# Altium PCB 电机驱动2.PcbDoc
Units mil, origin at the board's own origin, x right, y up, seen from the top; angles counter-clockwise.
Board outline 2768.94 x 1300.39 mil, 2 copper layers (Top Layer, Bottom Layer); 44 components, 28 nets, 129 pads, 42 vias.
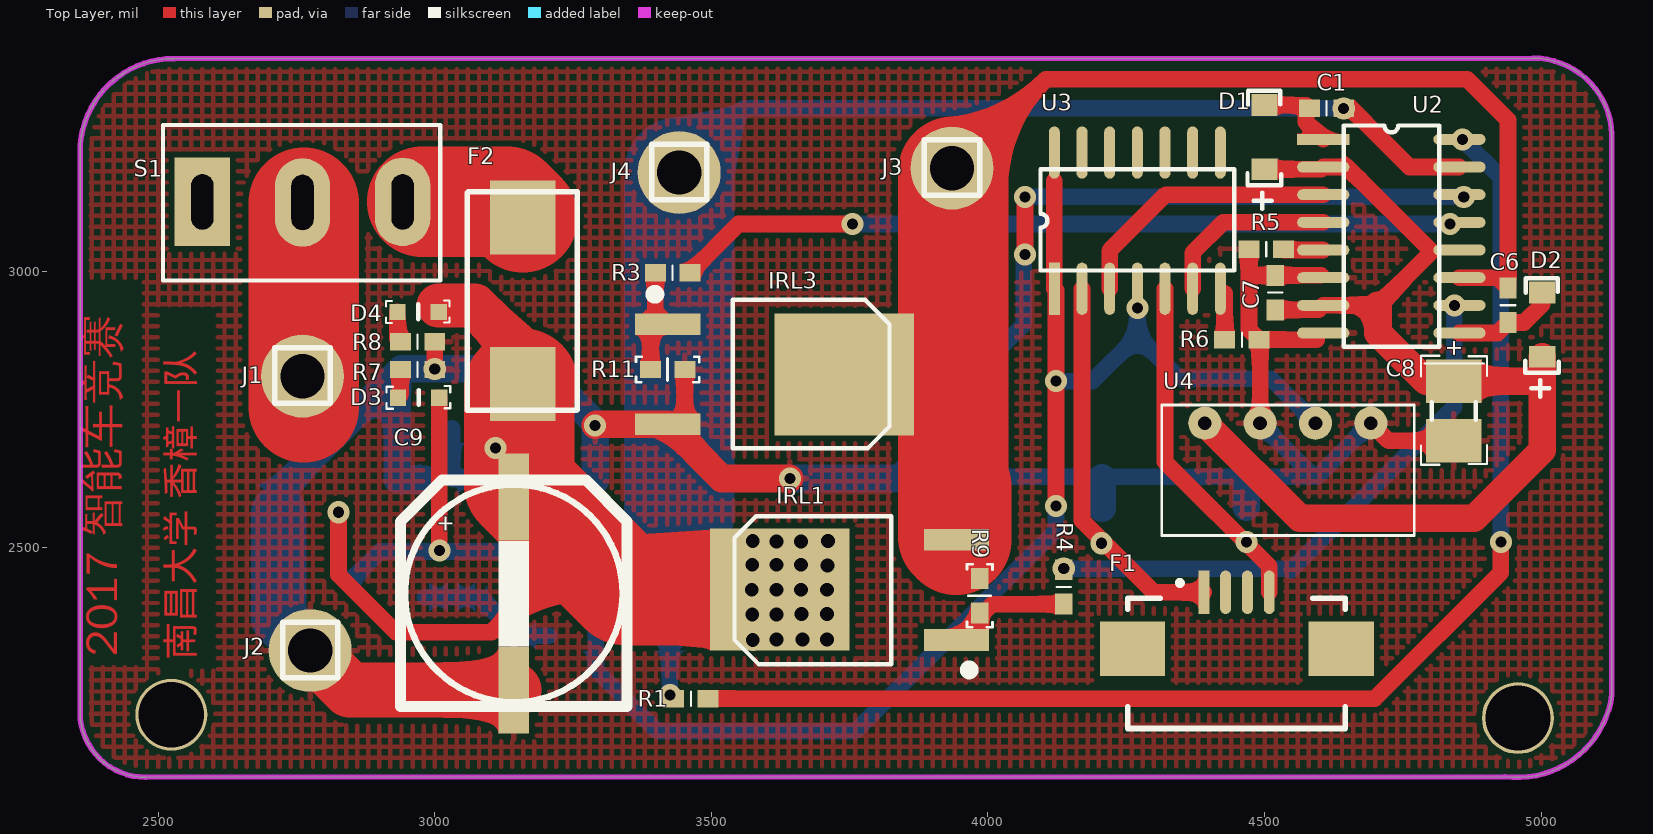
[diagram p0: Top Layer view]
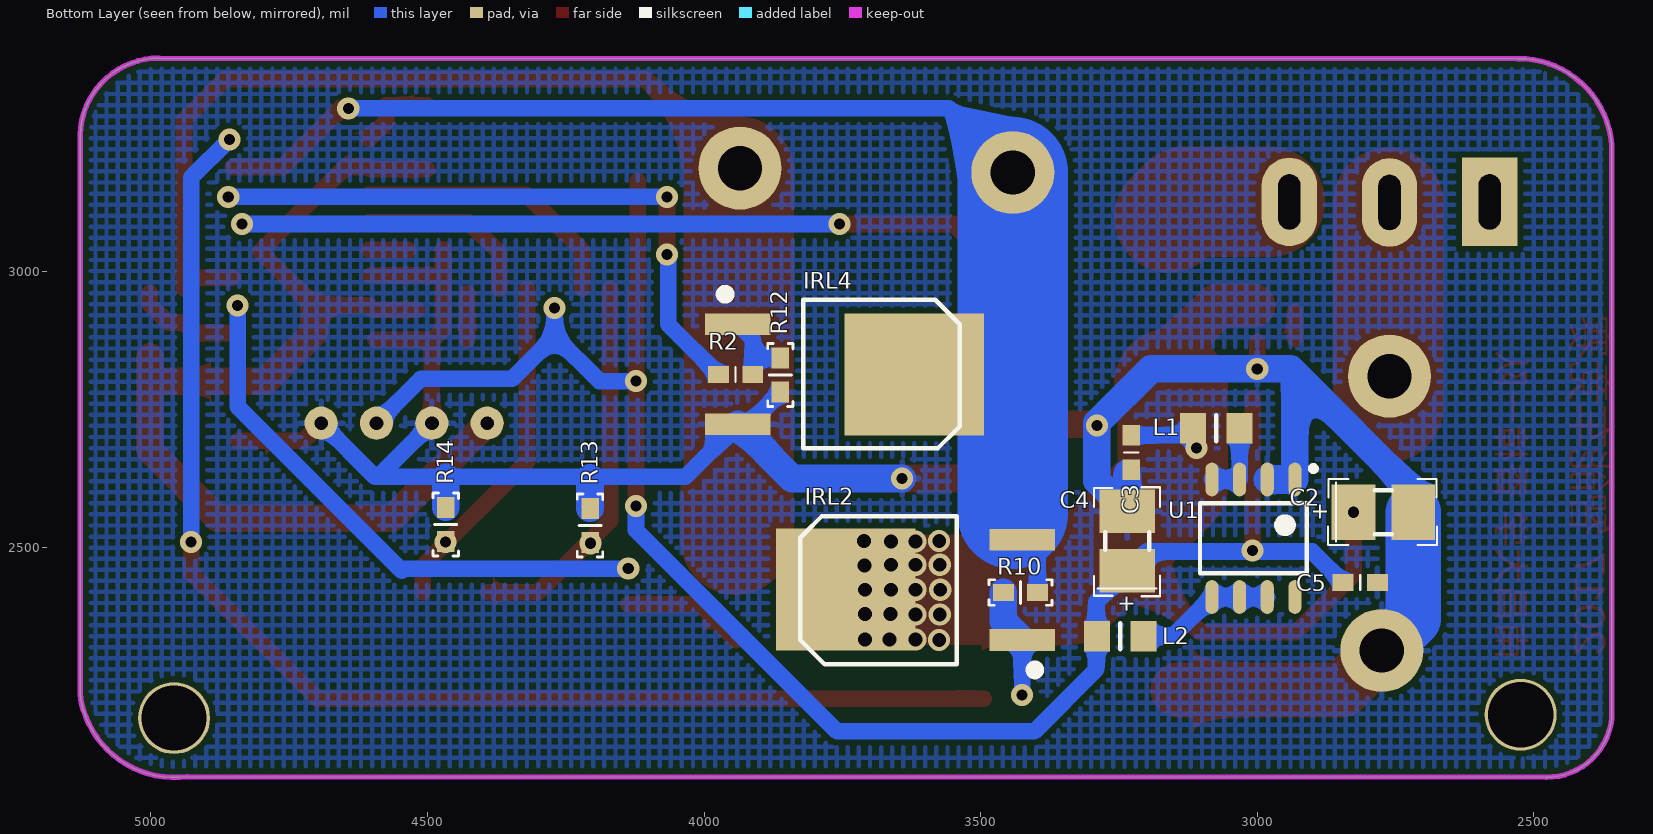
[diagram p1: Bottom Layer view, seen from below]
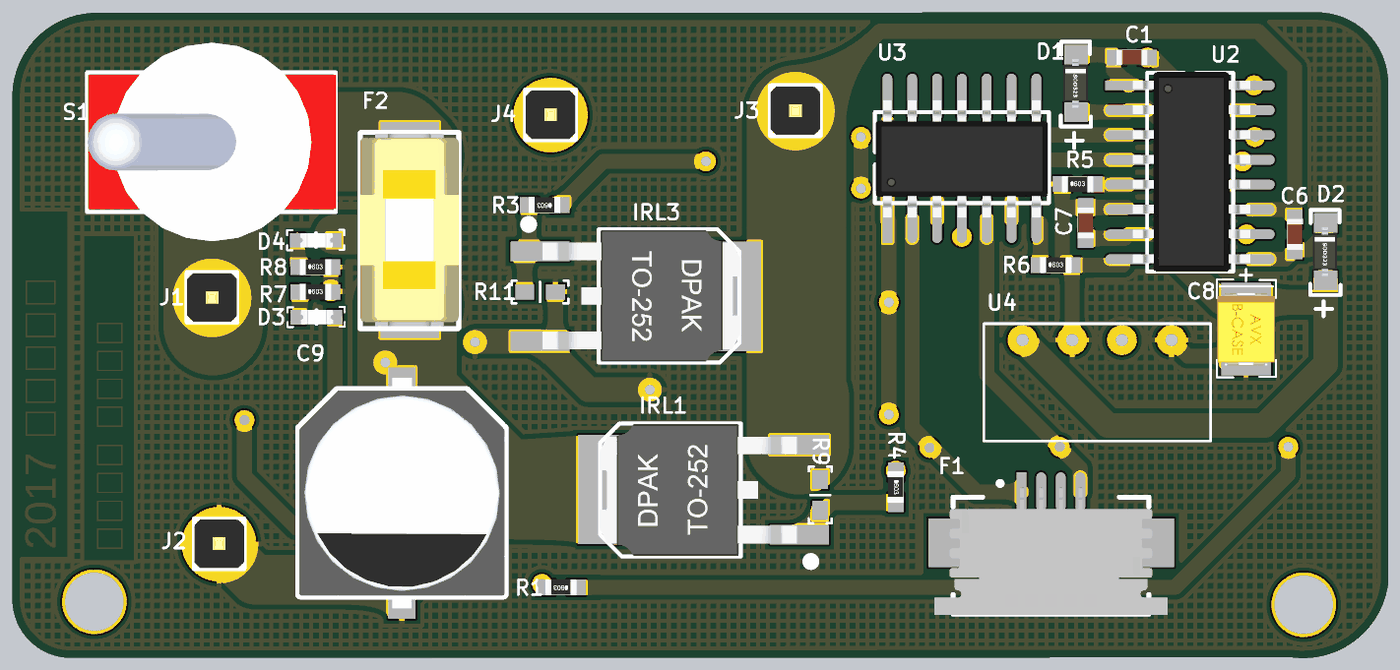
[diagram p2: 3D render of the assembled board from above, using the file's embedded part models]
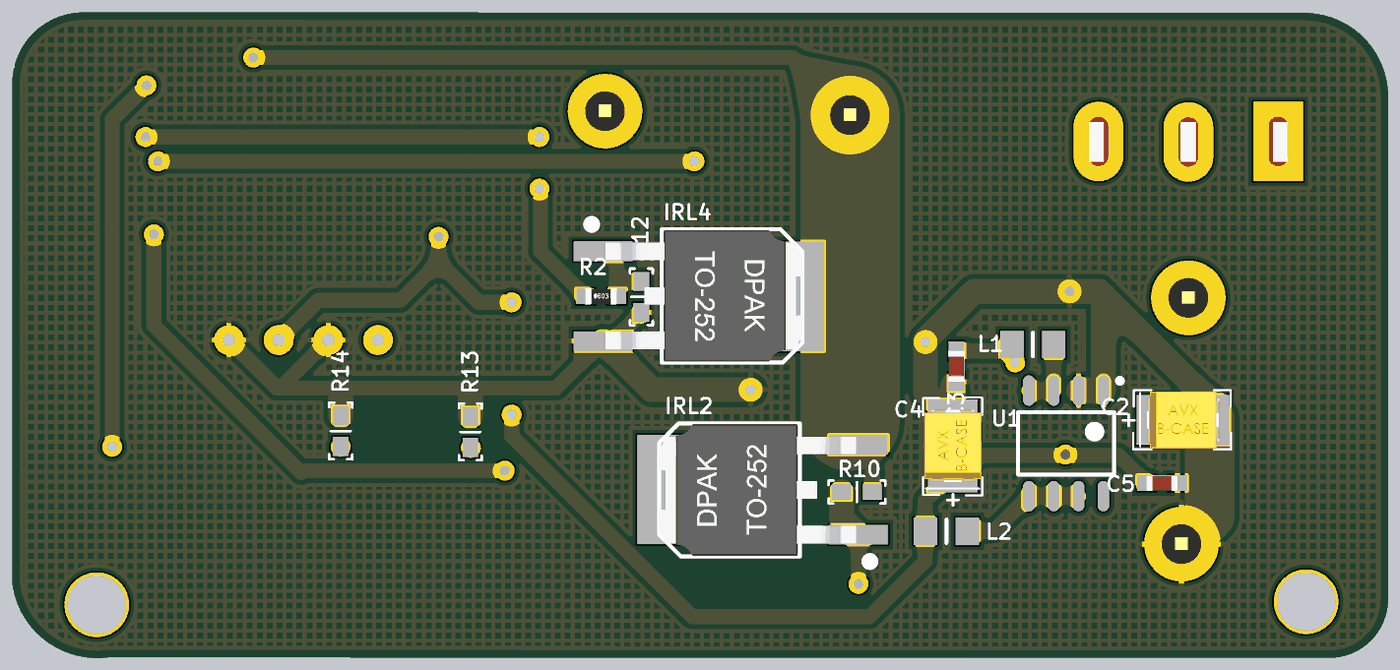
[diagram p3: 3D render of the assembled board from below, using the file's embedded part models]

## Layer stack, top to bottom
Top Solder: solder mask 0.4, Solder Resist, Dk 3.5
Top Layer: signal copper 1.4
Dielectric 1: dielectric 12.6, FR-4, Dk 4.8
Bottom Layer: signal copper 1.4
Bottom Solder: solder mask 0.4, Solder Resist, Dk 3.5

## Board outline
2359.01,2201.99 ccw(c2476.9,2202.91) 2477.82,2085.02 4934,2086 ccw(c4956.76,2257.12) 5127.88,2234.36 5127.88,3246.36 ccw(c4984.84,3241.83) 4985.03,3384.94 4984.79,3384.98 2529,3384 ccw(c2528,3214.94) 2358.94,3214.94 2359,3214

## Design rules (kind name [scope] priority, off if disabled: settings)
Clearance [All] p1: gap=10
PolygonConnect [All] p1: connectstyle=Relief reliefconductorwidth=10 reliefentries=4 polygonreliefangle="90 Angle" airgapwidth=10
RoutingVias [All] p1: holewidth=20 width=40 viastyle="Through Hole" minholewidth=20 minwidth=40 maxholewidth=20 maxwidth=40
SolderMaskExpansion [All] p1: expansion=4
UnpouredPolygon [All] p1: allowunpoured=FALSE
Width [All] p1: maxlimit=300 minlimit=3 preferedwidth=30
29 further rules are at their usual default settings.

## Components (designator, comment, footprint, x,y, rotation, side; value= is the part's Value field where it differs from the comment)
C1 "CAP-0603(1608)" CAP-0603 4612,3294 r0 top
C2 "CAP-TAN-3528(B)" CAP-3528 2772,2564 r180 bottom
C3 "CAP-0603(1608)" CAP-0603 3228,2672 r90 bottom
C4 "CAP-TAN-3528(B)" CAP-3528 3235,2512 r90 bottom
C5 "CAP-0603(1608)" CAP-0603 2814,2437 r0 bottom
C6 "CAP-0603(1608)" CAP-0603 4940,2938 r90 top
C7 "CAP-0603(1608)" CAP-0603 4519,2961 r270 top
C8 "CAP-TAN-3528(B)" CAP-3528 4842,2747 r270 top
C9 "CAP-SMD-1000UF" CAP-SMD-1000UF 3119,2416 r270 top
D1 "1N5819-S4" SOD-323 4505,3246 r90 top
D2 "1N5819-S4" SOD-323 5007,2907 r90 top
D3 "LED-0603" LED-0603 2971,2771 r180 top
D4 "LED-0603" LED-0603 2970,2926 r180 top
F1 "FPC-1.0-4" FPC-1.0-4 4444,2308 r0 top
F2 "FUSE-1808-Base" Fuse1808_Base 3159,3097 r270 top
IRL1 "IRLR7843" TO-252 3941,2427 r90 top
IRL2 "IRLR7843" TO-252 3427,2427 r90 bottom
IRL3 "IRLR7843" TO-252 3423,2810 r270 top
IRL4 "IRLR7843" TO-252 3937,2810 r270 bottom
J1 "IN+" HEADER1X1 2761,2811 r0 top
J2 "IN-" HEADER1X1 2775,2315 r0 top
J3 "OUT-" HEADER1X1 3935,3187 r0 top
J4 "OUT+" HEADER1X1 3442,3179 r0 top
L1 "INTUCTOR" "L0805 - duplicate" 3074,2716 r0 bottom
L2 "INTUCTOR" "L0805 - duplicate" 3248,2340 r0 bottom
R1 "RES-0603" RES-0603 3463,2227 r180 top
R2 "RES-0603" RES-0603 3943,2813 r180 bottom
R3 "RES-0603" RES-0603 3430,2997 r180 top
R4 "RES-0603" RES-0603 4137,2429 r270 top
R5 "RES-0603" RES-0603 4503,3039 r0 top
R6 "RES-0603" RES-0603 4459,2876 r0 top
R7 "RES-0603" RES-0603 2969,2822 r0 top
R8 "RES-0603" RES-0603 2969,2872 r0 top
R9 "RES" 0603RC 3985,2444 r270 top
R10 "RES" 0603RC 3397,2419 r0 bottom
R11 "RES" 0603RC 3452,2822 r180 top
R12 "RES" 0603RC 3862,2781 r90 bottom
R13 "1K" 0603RC 4206,2571 r270 bottom
R14 "1K" 0603RC 4467,2573 r270 bottom
S1 "SW-B" SW-B 2761,3124 r0 top
U1 "TPS7350" TPS7350(7333) 3007,2517 r270 bottom
U2 "HIP4082IB" SOIC16 4606,3238 r0 top
U3 "74HC08" SOIC14 4120,2973 r90 top
U4 "B0512-S-1W" B0512_S_1W 4532,2645 r0 top

## Footprints (in the part's own frame and the unit in brackets; to place one, negate y for a bottom-side part, rotate by r counter-clockwise, add the part's x,y. Pads: shape width x height; smd on the part's side, far side on the other; paste and mask are expansions set on the pad)
0603RC [mm]
  rect 0.965x0.8 smd: 1(0,0) 2(1.575,0)
  silkscreen extent -0.66,-0.58 2.24,0.58
B0512_S_1W [mil]
  round 60 hole 25: 1(160,80) 2(60,80) 3(-40,80) 4(-140,80)
  silkscreen extent -218,-123 239,113
CAP-0603 [mm]
  rect 0.96x0.8 smd: 1(-0.79,0) 2(0.79,0)
  silkscreen extent 0,-0.33 0,0.33, body extent -0.8,-0.41 0.8,0.41, height 0.8
CAP-3528 [mm]
  rect 2x2.54 smd: 1(-1.373,0) 2(1.373,0)
  silkscreen extent -2.54,-1.5 2.47,1.52, body extent -1.85,-1.47 1.85,1.46, height 2.03
CAP-SMD-1000UF [mm]
  rect 4x1.4 smd: 1(-4.455,0.61) 2(4.404,0.61)
  silkscreen extent -5.23,-4.59 5.16,5.81, body extent -5.93,-4.64 5.87,5.86, height 10.3
FPC-1.0-4 [mm]
  rect 3x2.5 smd: 0(-4.64,0.227) 0(4.936,0.227)
  rect 0.5x2 smd: 1(-1.365,2.825)
  oval 0.5x2 smd: 2(-0.365,2.825) 3(0.635,2.825) 4(1.635,2.825)
  silkscreen extent -4.87,-3.43 5.13,3.36, body extent -5.82,-3.47 6.1,3.08, height 2.66
Fuse1808_Base [mm]
  rect 3.4x3 smd: 1(0,0) 2(7.645,0)
  silkscreen extent -1.17,-2.54 8.86,2.5, body extent -1.1,-2.54 8.72,2.49, height 3.81
HEADER1X1 [mil]
  round 150 hole 80: 1(0,-0.99)
  silkscreen extent -50,-50 50,50, body extent -50,-49 50,49, height 336
"L0805 - duplicate" [mm]
  rect 1.2x1.4 smd: 1(-1.067,0) 2(1.067,0)
  silkscreen extent 0,-0.6 0,0.6
LED-0603 [mil]
  rect 29.37x29.5 smd: 1(-37.42,0) 2(37.42,0)
  silkscreen extent -57,-21 58,20, body extent -33,-15 31,14, height 27
RES-0603 [mm]
  rect 0.96x0.8 smd: 1(-0.79,0) 2(0.79,0)
  silkscreen extent 0,-0.33 0,0.33, body extent -0.8,-0.41 0.8,0.41, height 0.45
SOD-323 [mil]
  rect 39.37x47.24 smd: 1(-62,5) 2(54,5)
  silkscreen extent -134,-25 80,36, body extent -53,-18 45,31, height 39
SOIC14 [mm]
  rect 2.4x0.5 smd: 1(-0.127,0)
  oval 2.4x0.5 smd: 2(-0.127,-1.27) 3(-0.127,-2.54) 4(-0.127,-3.81) 5(-0.127,-5.08) 6(-0.127,-6.35) 7(-0.127,-7.62) 8(6.127,-7.62) 9(6.127,-6.35) 10(6.127,-5.08) 11(6.127,-3.81) 12(6.127,-2.54) 13(6.127,-1.27) 14(6.127,0)
  silkscreen extent 0.71,-8.25 5.36,0.64, body extent -0.03,-8.2 5.97,0.6, height 1.7
SOIC16 [mm]
  rect 2.4x0.5 smd: 1(0,0)
  oval 2.4x0.5 smd: 2(0,-1.27) 3(0,-2.54) 4(0,-3.81) 5(0,-5.08) 6(0,-6.35) 7(0,-7.62) 8(0,-8.89) 9(6.254,-8.89) 10(6.254,-7.62) 11(6.254,-6.35) 12(6.254,-5.08) 13(6.254,-3.81) 14(6.254,-2.54) 15(6.254,-1.27) 16(6.254,0)
  silkscreen extent 0.94,-9.53 5.33,0.64, body extent 0.2,-9.52 6.2,0.68, height 1.7
SW-B [mil]
  rect 100x160 hole 40 slot 100 at 90 deg: 1(-181,1)
  oval 100x160 hole 40 slot 100 at 90 deg: 2(0,0) 3(181,1)
  silkscreen extent -252,-141 249,140, body extent -251,-200 250,200, height 1120
TO-252 [mm]
  rect 1x3 smd: 1(-2.388,-0.051) 3(2.212,-0.051)
  rect 5.6x6.4 smd: 2(-0.076,8.052)
  silkscreen extent -3.94,-0.81 3.3,10.13, body extent -3.47,0.08 3.27,10.18, height 2.37
TPS7350(7333) [mm]
  oval 1.55x0.6 smd: 1(-2.7,1.905) 2(-2.7,0.635) 3(-2.7,-0.635) 4(-2.7,-1.905) 5(2.7,-1.905) 6(2.7,-0.635) 7(2.7,0.635) 8(2.7,1.905)
  silkscreen extent -3.32,-2.45 1.6,2.87

## Part data
C2 C4 C8: "0.15~150UF"
D1 D2: "S4"
F2: "保险丝"
J1 J2 J3 J4: library part Header1x1
R1 R2 R3 R4 R5 R6: library part RES-0805
R13 R14: library part Res2, "Resistor"

## Free pads (board coordinates)
  round 130 hole 118: 0(2524,2198) 0(4958,2192)

## Via types
v1: diameter 40, hole 20, Top Layer to Bottom Layer, 22 vias
v2: diameter 40, hole 25, Top Layer to Bottom Layer, 20 vias

## Nets (pads, with @x,y where several pads share a name; then routed paths per layer and width w, separated by ;. In a path a pad name is that pad's centre, name@x,y a point inside that pad or via, vN(x,y) a via of type N, cw(c..) or ccw(c..) an arc to the next point about the centre after c; other vN are vias at no path point)
5V: C4.1 C5.2 D3.1 L2.2 U3.1 U3.4 U3.14 U4.2 | length 3181.3
  Top Layer w30: v1(3008.42,2494.58) D3.1 ; U3.1 4120,3163 ; v1(4123,2575) v1(4123,2801) U3.1@4123,2965
  Bottom Layer w30: C5.2 2901.1,2493 3199.93,2493 C4.1 3291,2401.93 3291,2280 3403,2168 3759.58,2168 4123,2531.42 v1(4123,2575) ; v1(4123,2801) 4189,2801 4270,2882 ; v1(4270,2933) 4270,2882 ; U4.2 4512,2805 4347,2805 4270,2882
7.2_MOTOR: C2.1 C3.2 C9.1 D4.1 F2.2 IRL1.2 IRL2.2 L1.2 | length 1761.9
  Top Layer w30: v1(2826.07,2564) 2826.07,2450.93 2930,2347 3103,2347 3261.2,2505.2
  Top Layer w80: D4.1@3007.42,2937.75 3072.25,2937.75 3159,2851 F2.2
  Top Layer w200: F2.2 3153,2790 3153,2613.4 3261.2,2505.2 3342.4,2424 v2(3573,2424) v2(3618,2424) IRL1.2
  Bottom Layer w30: v1(3109.55,2679.87) 3132.78,2703.1 C3.2
  other v2: 3575,2333 3618,2334 3665,2334 3709,2334 3574,2379 3618,2379 3663,2380 3709,2380 3662,2424 3709,2424 3710,2468 3574,2469 3618,2469 3662,2469 3618,2511 3662,2511 3575,2512 3711,2512
12V: C7.2 C8.1 D1.1 D2.1 U2.2 U2.7 U2.12 U4.4 | length 1954.7
  Top Layer w30: D1.1 U2.2@4602,3184 ; C7.2 U2.7@4597.9,2929.9 ; U2.7 4705.07,2938 4802.07,3035 4649.07,3188 U2.2
  Top Layer w50: U4.4 4564,2553 4879,2553 5002,2676 D2.1 ; 4705.07,2938 4705.07,2887.93 4791.93,2801.07 C8.1 4995.93,2801.07
AGND: C2.2 C3.1 C4.2 C5.1 C7.1 C8.2 C9.2 IRL3.3 IRL4.3 J2.1 R5.1 R6.2 R7.2 R8.2 R11.1 R12.1 R13.1 R14.1 U1.1 U1.2 U2.6 U2.8 U4.1 U4.3 | length 4689.5
  Top Layer w30: R7.2 v1(3000.1,2823.1) R8.2 ; 3452,2697 R11.1 ; R5.1 4471.9,2987.9 ; U4.3 R6.2@4492,2874.1 ; 4594,2876 R6.2 4471.9,2894.2 4471.9,2987.9 ; U2.6@4601.9,2992.1 C7.1 4476.1,2992.1 4471.9,2987.9 ; U4.1 4724.07,2692.93 C8.2
  Top Layer w50: v1(3290,2721) 3291.9,2722.9 IRL3.3 3518.9,2625 v1(3642,2625)
  Top Layer w100: J2.1 2846.41,2242.6 C9.2
  Bottom Layer w30: R12.1 IRL4.3@3920.1,2722.9 ; IRL4.3 4033.9,2628 4589,2628 ; U4.3 4589,2628 ; U4.1 4595,2628 4589,2628
  Bottom Layer w50: C2.2 2717.93,2600.93 2932,2815 ; U1.2 U1.1 2932,2815 ; C3.1@3235,2633.9 C4.2 3290,2621.07 v1(3290,2721) 3290,2725.25 3192.14,2823.1 v1(3000.1,2823.1) 2940.1,2823.1 2932,2815 ; v1(3642,2625) 3841.1,2625 IRL4.3 ; R13.1 4206,2626 ; R14.1 4467,2627
  Bottom Layer w100: C2.2 2717.93,2371.08 J2.1
DGND: R6.1 U3.7 | length 84.1
  Top Layer w30: R6.1 U3.7@4427.9,2960.1
MOTOR1+: C1.2 IRL2.3 IRL4.2 J4.1 R10.1 U2.15 | length 2188.5
  Top Layer w30: C1.2@4643.1,3290.9 C1.2 4656,3294 4762,3188 U2.15
  Bottom Layer w30: R10.1 3397,2486.1 ; J4.1 3557.99,3294 v1(4643,3294)
  Bottom Layer w200: 3442,2561.74 J4.1
MOTOR1-: C6.2 IRL1.3 IRL3.2 J3.1 R9.1 U2.11 | length 2266
  Top Layer w30: J3.1@3937,3179.01 4104.99,3347 4866,3347 4940,3273 C6.2 4921.1,2988 U2.11
  Top Layer w200: IRL1.3@3937,2520.11 3937,2616 ; J3.1@3937,3179.01 3937,2616 ; IRL1.3 3943,2610 3937,2616
NetC1_1: C1.1 D1.2 U2.1 | length 146.3
  Top Layer w30: D1.2 4574.9,3300 C1.1 ; C1.1@4574.9,3288 4574.9,3269.1 U2.1
NetC6_1: C6.1 D2.2 U2.9 | length 192.3
  Top Layer w30: U2.9 4921.1,2888 C6.1 4968.9,2906.9 5002,2940 D2.2
NetD3_2: D3.2 R7.1 | length 46.7
  Top Layer w30: D3.2@2937.9,2775.32 R7.1
NetD4_2: D4.2 R8.1 | length 48.7
  Top Layer w30: R8.1@2932.58,2877.32 D4.2
NetF2_1: F2.1 S1.3 | length 192.6
  Top Layer w200: S1.3@2978,3125 3131,3125 F2.1
NetIRL1_1: IRL1.1 R4.2 R9.2 | length 218.1
  Top Layer w30: IRL1.1 4005.9,2395.9 ; 4007.9,2397.9 R4.2
NetIRL2_1: IRL2.1 R1.2 R10.2 | length 199.2
  Bottom Layer w30: v1(3425,2233.9) IRL2.1
  Bottom Layer w50: IRL2.1 3459.01,2367.01 R10.2
NetIRL3_1: IRL3.1 R3.2 R11.2 | length 197.4
  Top Layer w30: R11.2 IRL3.1@3389.99,2917.2 ; R3.2 3398.9,2926.1 IRL3.1
NetIRL4_1: IRL4.1 R2.2 R12.2 | length 152.1
  Bottom Layer w30: R12.2 3911.89,2843.01 ; R2.2 3911.9,2876.9 IRL4.1
NetJ1_1: J1.1 S1.2 | length 369
  Top Layer w200: J1.1@2763,2754 S1.2@2763,3123
NetL1_2: L1.1 U1.3 U1.4 | length 142.7
  Bottom Layer w30: L1.1 U1.3 U1.4
NetL2_1: L2.1 U1.5 U1.6 U1.7 | length 253.9
  Bottom Layer w30: U1.7 U1.6 U1.5 3151.7,2341 L2.1@3207,2341
NetR1_1: R1.1 U2.16 | length 2338.9
  Top Layer w30: R1.1 4699,2227 4927,2455 v1(4927,2510)
  Bottom Layer w30: v1(4858,3238) 4927,3169 v1(4927,2510)
NetR2_1: R2.1 U2.14 | length 1152.5
  Top Layer w30: v1(4067,3030) v1(4067,3134)
  Bottom Layer w30: R2.1 4065,2903.9 4065,3028 v1(4067,3030) ; v1(4067,3134) v1(4860,3134)
NetR3_1: R3.1 U2.13 | length 1410.3
  Top Layer w30: R3.1 3549.1,3085 v1(3755,3085)
  Bottom Layer w30: v1(3755,3085) v1(4835,3085)
NetR4_1: R4.1 U2.10 | length 1008.1
  Bottom Layer w30: v1(4137,2462) 4542.2,2462 ; 4546.1,2458.1 4843,2755 v1(4843,2938)
NetR5_2: R5.2 U2.5 | length 70.9
  Top Layer w30: R5.2@4535.1,3038 U2.5
PWM1: F1.4 R14.2 U3.5 | length 626.8
  Top Layer w30: U3.5 4320,2655 4508.37,2466.63 F1.4
  other v1: 4467,2510
PWM1N1: U2.4 U3.6 | length 323.8
  Top Layer w30: U3.6 4370,3033 4425,3088 U2.4
PWM1N2: U2.3 U3.3 | length 496.8
  Top Layer w30: U3.3 4220,3037 4321,3138 U2.3
PWM2: F1.1 R13.2 U3.2 | length 693
  Top Layer w30: U3.2 4170,2549 4299.79,2419.21 F1.1
  other v1: 4205,2508
pads on no net: F1.0 F1.2 F1.3 S1.1 U1.8 U3.8 U3.9 U3.10 U3.11 U3.12 U3.13

## Polygon pours and split planes (outlines as drawn)
AGND on Top Layer "Top Layer-No Net" (hatched 90Degree grid 20 track 8, remove dead copper, pour order 4): 2229,3526 5332,3526 5335,3529 5332,3526 5332,1922 2224,1922 2217,1915 2226,1924 2226,3526
AGND on Bottom Layer "Top Layer-No Net" (hatched 90Degree grid 20 track 8, remove dead copper, pour order 6): 2205,3571 5296,3571 5419,3448 5276,3305 5276,1905 2201,1905 2128,1978 2232,2082 2232,3641

## Keep-outs
Keep-Out Layer:
  lines w10: 2358.94,3214.94 cw(c2528,3214.94) 2529,3384 4984.79,3384.98 ; 2359.01,2201.99 ccw(c2476.9,2202.91) 2477.82,2085.02 4934,2086 ccw(c4956.76,2257.12) 5127.88,2234.36 5127.88,3246.36 ccw(c4984.84,3241.83) 4985.03,3384.94 ; 2359,2202.91 2359,3214

## Other copper
Top Layer:
  text "2017 智能车竞赛" at 2446,2303 h100 r90
  text "南昌大学 香樟一队" at 2581,2297 h85 r90

## Text inside footprints (layer, text, board x,y; h text height)
C2: Bottom Overlay "+" at 2902.93,2552 h30
C4: Bottom Overlay "+" at 3223,2381.07 h30 r270
C8: Top Overlay "+" at 4830,2877.93 h30 r270
C9: Top Overlay "+" at 3007.57,2560.68 h30 r270
U1: Mechanical 15 "1" at 3013.47,2499.29 h40